# Altium PCB cs301_YourGroupNumber--4_holes.PcbDoc
Units mil, origin at the board's own origin, x right, y up, seen from the top; angles counter-clockwise.
Board outline 10825 x 6635 mil, 2 copper layers (Top Layer, Bottom Layer); 28 components, 13 nets, 134 pads, 0 vias.
Unrouted connection lines stored in the file: 33.
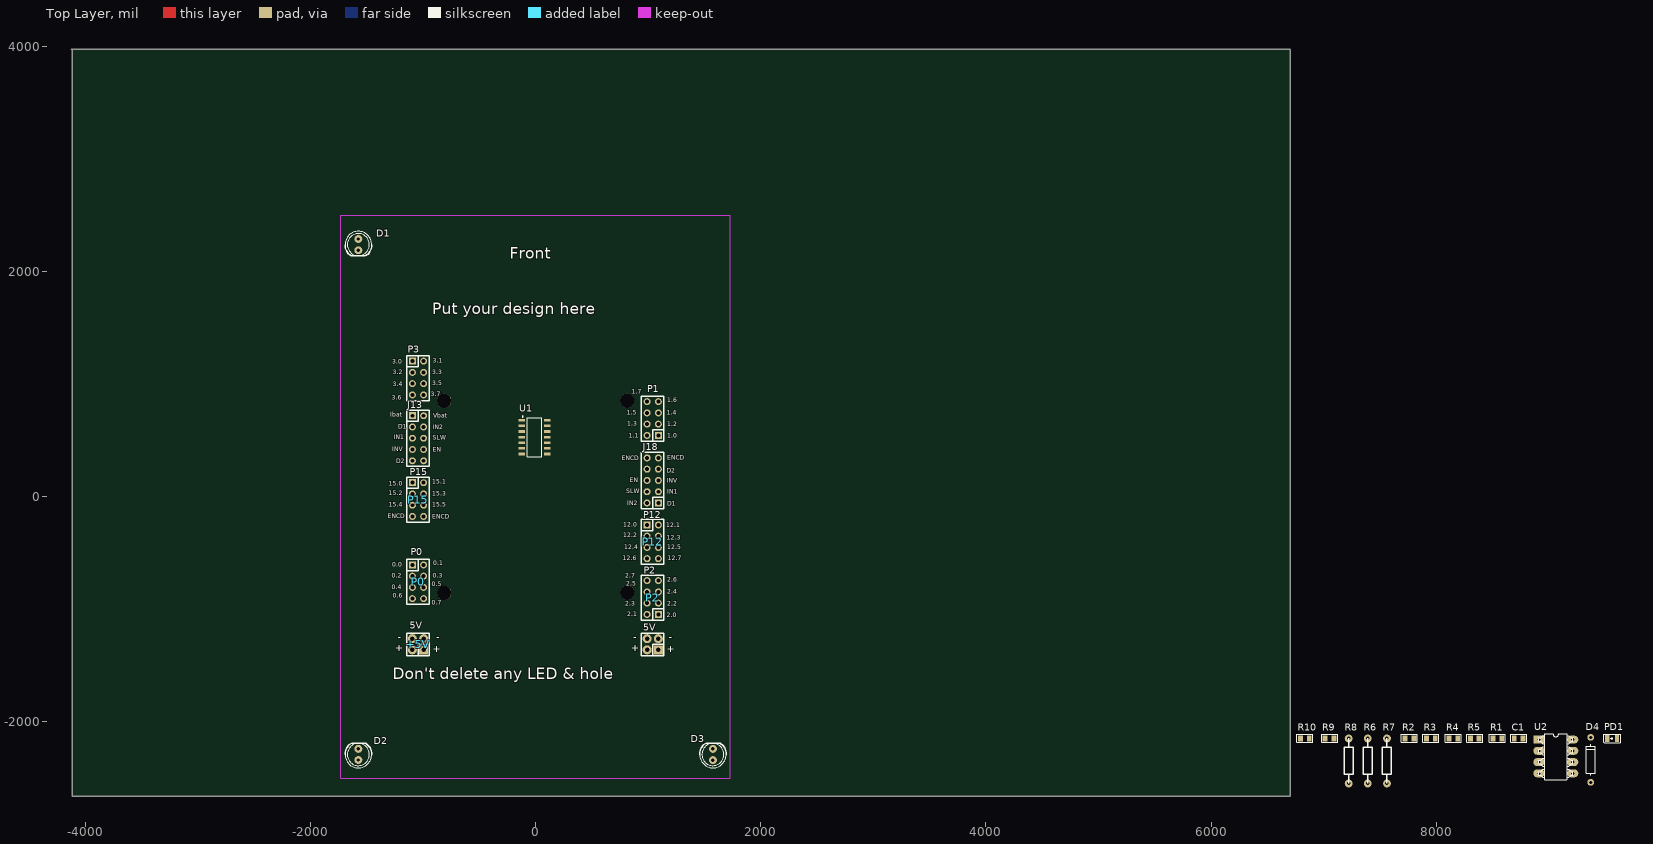
[diagram p0: Top Layer view]
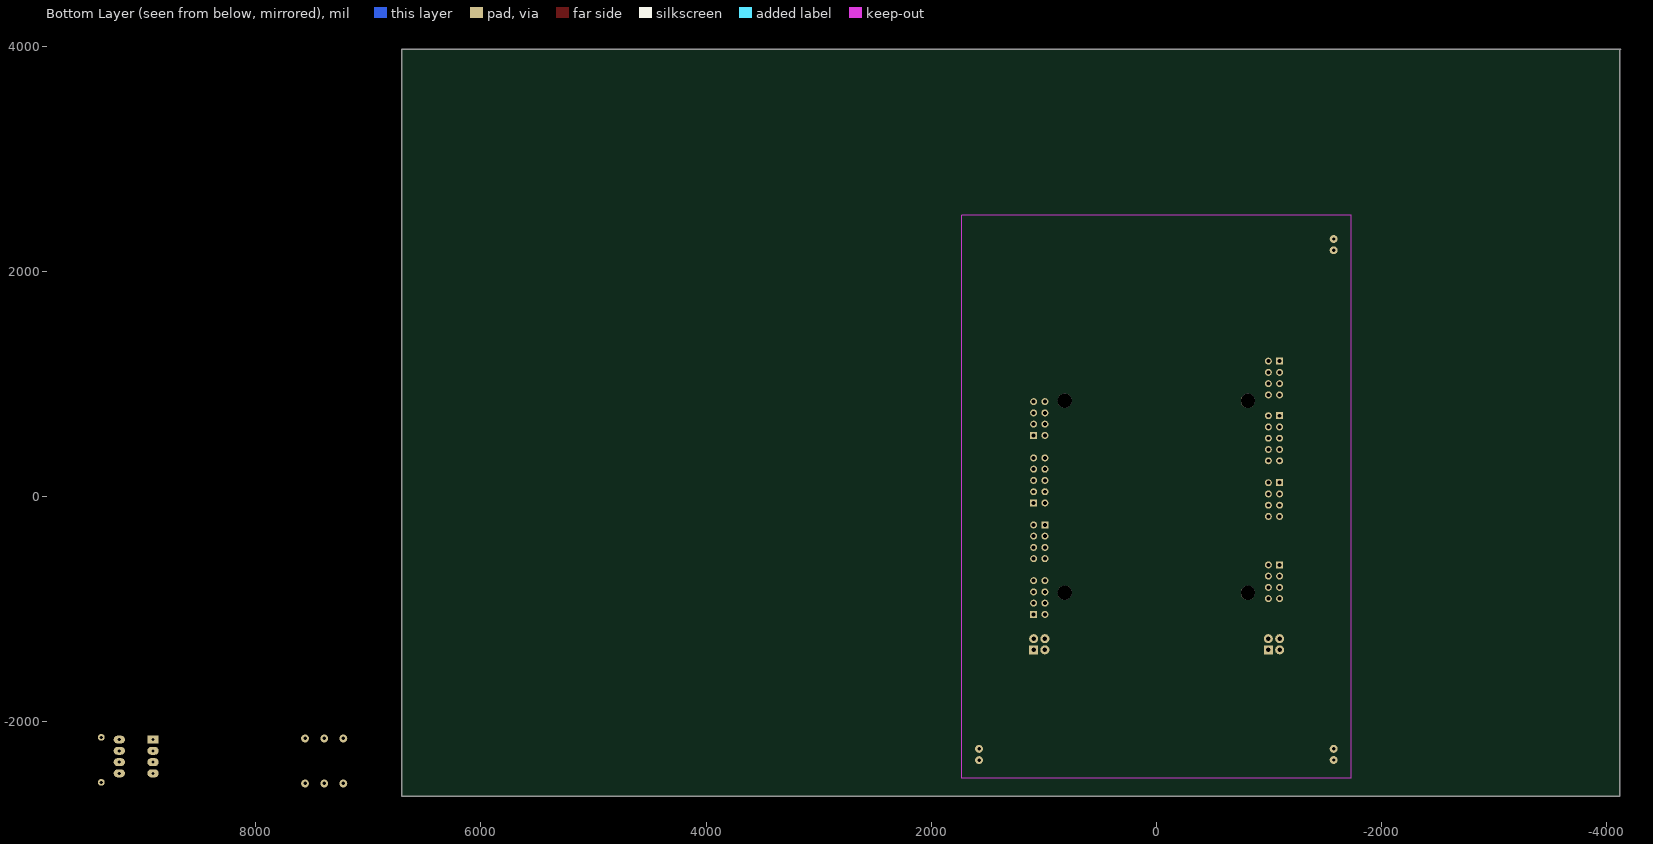
[diagram p1: Bottom Layer view, seen from below]

## Layer stack, top to bottom
Top Solder: solder mask 0.4, Solder Resist, Dk 3.5
Top Layer: signal copper 1.4
Dielectric1: dielectric 12.6, FR-4, Dk 4.8
Bottom Layer: signal copper 1.4
Bottom Solder: solder mask 0.4, Solder Resist, Dk 3.5

## Board outline
-4118.11,-2656.69 -4113.11,-2661.69 6701.89,-2661.69 6701.89,3973.31 -4123.11,3973.31 -4118.11,3968.31 -4118.11,-2656.69

## Design rules (kind name [scope] priority, off if disabled: settings)
Clearance [All] p1: gap=10 ignorepadtopadclearanceinfootprint=FALSE except(0: Arc-Hole Track-Hole SMDPad-Hole THPad-Hole Via-Hole Fill-Hole Poly-Hole Region-Hole Text-Hole)
PolygonConnect [All] p1: connectstyle=Relief reliefconductorwidth=20 reliefentries=4 polygonreliefangle="90 Angle" airgapwidth=10
RoutingVias [All] p1: holewidth=28 width=50 viastyle="Through Hole" minholewidth=28 minwidth=50 maxholewidth=28 maxwidth=50
SilkToSolderMaskClearance SilkscreenOverComponentPads [IsPad] p1: minsilkscreentomaskgap=10 clearancetoexposedcopper=TRUE
SolderMaskExpansion [All] p1: expansion=4 istentingtop=FALSE
Width [All] p1: maxlimit=30 minlimit=10 preferedwidth=10 minimp=50.000000 maximp=50.000000 favimp=50.000000
29 further rules are at their usual default settings.

## Components (designator, comment, footprint, x,y, rotation, side; value= is the part's Value field where it differs from the comment)
5V "5V" IDC4 1090,-1360 r90 top locked
+5V "5V" IDC4 -995,-1360 r90 top locked
C1 "57nF" "0805 CAP" 8731.89,-2146.69 r0 top
D1 "LED" LED0.1/5MM#1 -1574.8,2189.76 r180 top locked
D2 "LED" LED0.1/5MM#2 -1574.8,-2239.37 r0 top locked
D3 "LED" LED0.1/5MM#1 1574.8,-2239.37 r0 top locked
D4 "BAT85" BAT85 9371.89,-2336.69 r90 top
J13 "CON10" IDC10 -1095,720 r270 top locked
J18 "CON10" IDC10 1090,-55 r90 top locked
P0 "P0" idc8 -1095,-605 r270 top locked
P1 "P1" idc8 1090,545 r90 top locked
P2 "P2" idc8 1090,-1045 r90 top locked
P3 "P3" idc8 -1095,1205 r270 top locked
P12 "P12" idc8 990,-250 r270 top locked
P15 "P15" IDC8 -1095,125 r270 top locked
PD1 "SD019" SD019 9561.89,-2146.69 r0 top
R1 "6.8M" "0805 RES" 8541.89,-2146.69 r0 top
R2 "2.7M" "0805 RES" 7761.89,-2146.69 r0 top
R3 "1.5k" "0805 RES" 7951.89,-2146.69 r0 top
R4 "22k" "0805 RES" 8151.89,-2146.69 r0 top
R5 "820k" "0805 RES" 8341.89,-2146.69 r0 top
R6 "RES2" AXIAL0.4 7391.89,-2546.69 r90 top
R7 "RES2" AXIAL0.4 7561.89,-2546.69 r90 top
R8 "RES2" AXIAL0.4 7221.89,-2546.69 r90 top
R9 "820k" "0805 RES" 7051.89,-2146.69 r0 top
R10 "68k" "0805 RES" 6831.89,-2146.69 r0 top
U1 "LM324DR2G" SOIC-14 -10,530 r0 top
U2 "LM393AN" ECE-DIP8 8911.89,-2156.69 r0 top

## Footprints (in the part's own frame and the unit in brackets; to place one, negate y for a bottom-side part, rotate by r counter-clockwise, add the part's x,y. Pads: shape width x height; smd on the part's side, far side on the other; paste and mask are expansions set on the pad)
"0805 CAP" [mm] "http://www.digikey.co.nz/Web%20Export/Supplier%20Content/Vishay_8026/PDF/VishayBeyschlag_SolderPad.pdf?redirected=1 with dimension G modified by +0.25mm"
  rect 1.1x1.4 smd: 1(-1,0) 2(1,0)
  silkscreen extent -1.8,-0.9 1.8,0.9, body extent -1.04,-0.66 1.04,0.66, height 0.61
"0805 RES" [mm] "http://www.digikey.co.nz/Web%20Export/Supplier%20Content/Vishay_8026/PDF/VishayBeyschlag_SolderPad.pdf?redirected=1 with dimension G modified by +0.25mm"
  rect 1.1x1.4 smd: 1(-1,0) 2(1,0)
  silkscreen extent -1.8,-0.9 1.8,0.9, body extent -1.04,-0.66 1.04,0.66, height 0.61
AXIAL0.4 [mil]
  round 70 hole 31: 1(0,0) 2(400,0)
  silkscreen extent 0,-40 400,40
BAT85 [mil]
  round 60 hole 27.56: 1(-200,0) 2(200,0)
  silkscreen extent -138,-40 138,40, body extent -211,-52 211,52, height 92
ECE-DIP8 [mil]
  rect 100x70 hole 28: 1(0,0)
  oval 100x70 hole 28: 2(0,-100) 3(0,-200) 4(0,-300) 5(300,-300) 6(300,-200) 7(300,-100) 8(300,0)
  silkscreen extent 0,-357 300,50
IDC4 [mil]
  rect 80x80 hole 40: 1(0,0)
  round 80 hole 40: 2(0,100) 3(100,0) 4(100,100)
  silkscreen extent -50,-50 150,150
idc8 [mil]
  rect 62x62 hole 35: 1(0,0)
  round 62 hole 35: 2(0,100) 3(100,0) 4(100,100) 5(200,0) 6(200,100) 7(300,0) 8(300,100)
  silkscreen extent -50,-50 350,150
IDC8 [mil]
  rect 62x62 hole 35: 1(0,0)
  round 62 hole 35: 2(0,100) 3(100,0) 4(100,100) 5(200,0) 6(200,100) 7(300,0) 8(300,100)
  silkscreen extent -50,-50 350,150
IDC10 [mil]
  rect 62x62 hole 35: 1(0,0)
  round 62 hole 35: 2(0,100) 3(100,0) 4(100,100) 5(200,0) 6(200,100) 7(300,0) 8(300,100) 9(400,0) 10(400,100)
  silkscreen extent -50,-50 450,150
LED0.1/5MM#1 [mil]
  round 70 hole 30: A(0,0) K(0,-100)
  silkscreen extent -118,-168 118,50
LED0.1/5MM#2 [mil]
  round 70 hole 30: A(0,0) K(0,-98.43)
  silkscreen extent -118,-168 118,50
SD019 [mm]
  rect 1x1.5 smd: 1(-1.1,0) 2(1.1,0)
  silkscreen extent -1.9,-1 1.9,1, body extent -1,-0.63 1,0.63, height 1.1
SOIC-14 [mm] "SOIC, 14-Leads, Body 8.75x4mm, Pitch 1.27mm"
  rect 1.48x0.58 smd: 1(-2.86,3.81) 2(-2.86,2.54) 3(-2.86,1.27) 4(-2.86,0) 5(-2.86,-1.27) 6(-2.86,-2.54) 7(-2.86,-3.81) 8(2.86,-3.81) 9(2.86,-2.54) 10(2.86,-1.27) 11(2.86,0) 12(2.86,1.27) 13(2.86,2.54) 14(2.86,3.81)
  silkscreen extent -2.78,-4.38 1.67,4.77, body extent -3.1,-4.38 3.1,4.37, height 1.75

## Part data
5V +5V: library part CON4, "Connector"
C1: library part CerCap_SMT_0805, "SMT ceramic capacitor 0805 size"
J13 J18: "Connector"
P0 P1 P2 P3: library part CON8, "Connector"
P12 P15: library part CON8_1, "Connector"
R1 R2 R3 R4 R5 R9 R10: library part Res_SMT_0805, "0805 resistor", ComponentLink1Description=https://nz.mouser.com/datasheet/2/315/AOA0000C304-1149620.pdf, LatestRevisionDate=17-Jul-2002, LatestRevisionNote="Re-released for DXP Platform.", PackageReference=AXIAL-0.4, Published=8-Jun-2000, Publisher="Altium Limited"
U1: library part LM324DR_SMT_SOIC16, "Single Supply Quad Operational Amplifier, 3 to 32 V, 0 to 70 degC, 14-Pin SOIC, Pb-Free, Tape and Reel", Manufacturer="On Semiconductor", ComponentLink1Description="Manufacturer URL", ComponentLink1URL=http://www.onsemi.com/, ComponentLink2Description=Datasheet, ComponentLink2URL=http://www.onsemi.cn/pub_link/Collateral/LM324-D.PDF, ComponentLink3Description="Package Specification", ComponentLink3URL=http://www.onsemi.com/pub_link/Collateral/751A-03.PDF, DatasheetVersion="Rev. 25", Mounting Technology="Surface Mount", PackageDescription="14-Pin Small Outline Integrated Circuit, Body 8.65 x 3.9 mm, Pitch 1.27 mm", PackageReference=SOIC-14-751A-03, PackageVersion="Rev. K, 05/2011", Packing="Tape and Reel", PartNumber=LM324DR2G, RoHS=TRUE, VCC Max (V)=32, VCC Min (V)=3
U2: "Dual Comparator", ComponentLink1Description="Manufacturer Link", ComponentLink1URL=http://www.onsemi.com/site/products/taxonomy/0,4438,133,00.html, DatasheetVersion=1988, LatestRevisionDate=06-Jun-2005, LatestRevisionNote="Stylized 3D Model Added.", PackageDescription="DIP; 8 Leads; Row Spacing 7.62 mm; Pitch 2.54 mm", PackageReference=626-05, Published=17-Jul-2002, Publisher="Altium Limited"

## Free pads (board coordinates)
  round 125.98 hole 125.98 unplated: 1(-813,-853) 1(-813,853) 1(813,-853) 1(813,853)

## Nets (pads, with @x,y where several pads share a name; then routed paths per layer and width w, separated by ;. In a path a pad name is that pad's centre, name@x,y a point inside that pad or via, vN(x,y) a via of type N, cw(c..) or ccw(c..) an arc to the next point about the centre after c; other vN are vias at no path point)
+5: PD1.1 R9.2 U1.11 U2.4
+5V: 5V.1 5V.2 +5V.1 +5V.2
GND: 5V.3 5V.4 +5V.3 +5V.4 R1.1 R2.2 R4.1 R5.1 R10.1 U1.4 U2.8
NetC1_1: C1.1 R3.2 U1.1
NetC1_2: C1.2 D4.1 R4.2
NetD1_A: D1.A R8.1
NetD2_A: D2.A R6.1
NetD3_A: D3.A R7.2
NetD4_2: D4.2 R5.2 U2.3
NetPD1_2: PD1.2 R1.2 U1.3
NetR2_1: R2.1 R3.1 U1.2
NetR9_1: R9.1 R10.2 U1.5
Vref: U1.6 U1.7 U2.2
pads on no net: D1.K D2.K D3.K J13.1 J13.2 J13.3 J13.4 J13.5 J13.6 J13.7 J13.8 J13.9 J13.10 J18.1 J18.2 J18.3 J18.4 J18.5 J18.6 J18.7 J18.8 J18.9 J18.10 P0.1 P0.2 P0.3 P0.4 P0.5 P0.6 P0.7 P0.8 P1.1 P1.2 P1.3 P1.4 P1.5 P1.6 P1.7 P1.8 P2.1 P2.2 P2.3 P2.4 P2.5 P2.6 P2.7 P2.8 P3.1 P3.2 P3.3 P3.4 P3.5 P3.6 P3.7 P3.8 P12.1 P12.2 P12.3 P12.4 P12.5 P12.6 P12.7 P12.8 P15.1 P15.2 P15.3 P15.4 P15.5 P15.6 P15.7 P15.8 R6.2 R7.1 R8.2 U1.8 U1.9 U1.10 U1.12 U1.13 U1.14 U2.1 U2.5 U2.6 U2.7

## Keep-outs
Keep-Out Layer:
  lines w10: -1730,-2500 1730,-2500 1730,2500 -1730,2500 -1730,-2500

## Silkscreen, mask and mechanical layers (free items; w line width, h text height)
Top Overlay:
  text "Front" at -228.11,2113.31 h100
  text "Put your design here" at -920,1620 h100
  text "3.1" at -915,1190 h40
  text "3.0" at -1275,1180 h40
  text "3.2" at -1270,1090 h40
  text "3.3" at -920,1090 h40
  text "3.5" at -920,990 h40
  text "3.4" at -1270,980 h40
  text "1.7" at 855,915 h40
  text "3.7" at -930,895 h40
  text "3.6" at -1280,860 h40
  text "1.6" at 1170,840 h40
  text "1.5" at 810,730 h40
  text "1.4" at 1165,730 h40
  text "Ibat" at -1290,710 h40
  text "Vbat" at -910,700 h40
  text "1.3" at 815,630 h40
  text "1.2" at 1170,625 h40
  text "D1" at -1220,605 h40
  text "IN2" at -915,600 h40
  text "1.1" at 825,525 h40
  text "1.0" at 1170,525 h40
  text "IN1" at -1260,510 h40
  text "SLW" at -915,505 h40
  text "INV" at -1275,405 h40
  text "EN" at -915,400 h40
  text "ENCD" at 1170,330 h40
  text "ENCD" at 765,325 h40
  text "D2" at -1240,300 h40
  text "D2" at 1165,215 h40
  text "EN" at 835,130 h40
  text "INV" at 1165,125 h40
  text "15.1" at -920,115 h40
  text "15.0" at -1305,100 h40
  text "SLW" at 805,30 h40
  text "IN1" at 1170,25 h40
  text "15.2" at -1305,15 h40
  text "15.3" at -920,10 h40
  text "IN2" at 815,-75 h40
  text "D1" at 1170,-80 h40
  text "15.4" at -1305,-90 h40
  text "15.5" at -920,-90 h40
  text "ENCD" at -1315,-190 h40
  text "ENCD" at -920,-195 h40
  text "12.0" at 780,-265 h40
  text "12.1" at 1160,-270 h40
  text "12.2" at 780,-360 h40
  text "12.3" at 1165,-380 h40
  text "12.4" at 785,-465 h40
  text "12.5" at 1170,-465 h40
  text "12.6" at 775,-565 h40
  text "12.7" at 1175,-565 h40
  text "0.1" at -910,-610 h40
  text "0.0" at -1275,-620 h40
  text "0.2" at -1280,-720 h40
  text "0.3" at -915,-720 h40
  text "2.7" at 795,-720 h40
  text "2.6" at 1170,-755 h40
  text "2.5" at 805,-790 h40
  text "0.5" at -925,-795 h40
  text "0.4" at -1280,-820 h40
  text "2.4" at 1170,-860 h40
  text "0.6" at -1270,-895 h40
  text "0.7" at -925,-960 h40
  text "2.3" at 795,-970 h40
  text "2.2" at 1170,-970 h40
  text "2.1" at 815,-1060 h40
  text "2.0" at 1165,-1070 h40
  text "-" at -1195,-1230 h60 r180
  text "-" at -850,-1230 h60 r180
  text "-" at 900,-1230 h60 r180
  text "-" at 1215,-1230 h60 r180
  text "+" at -1185,-1380 h60 r90
  text "+" at 910,-1380 h60 r90
  text "+" at -850,-1390 h60 r90
  text "+" at 1225,-1390 h60 r90
  text "Don't delete any LED & hole" at -1270,-1620 h100